# Altium PCB PCB1.PcbDoc
Units mm, origin at the board's own origin, x right, y up, seen from the top; angles counter-clockwise.
Board outline 33.58 x 53.72 mm, 2 copper layers (Top Layer, Bottom Layer), stack 1.569 mm thick; 4 components, 39 nets, 80 pads, 0 vias.
Unrouted connection lines stored in the file: 3.
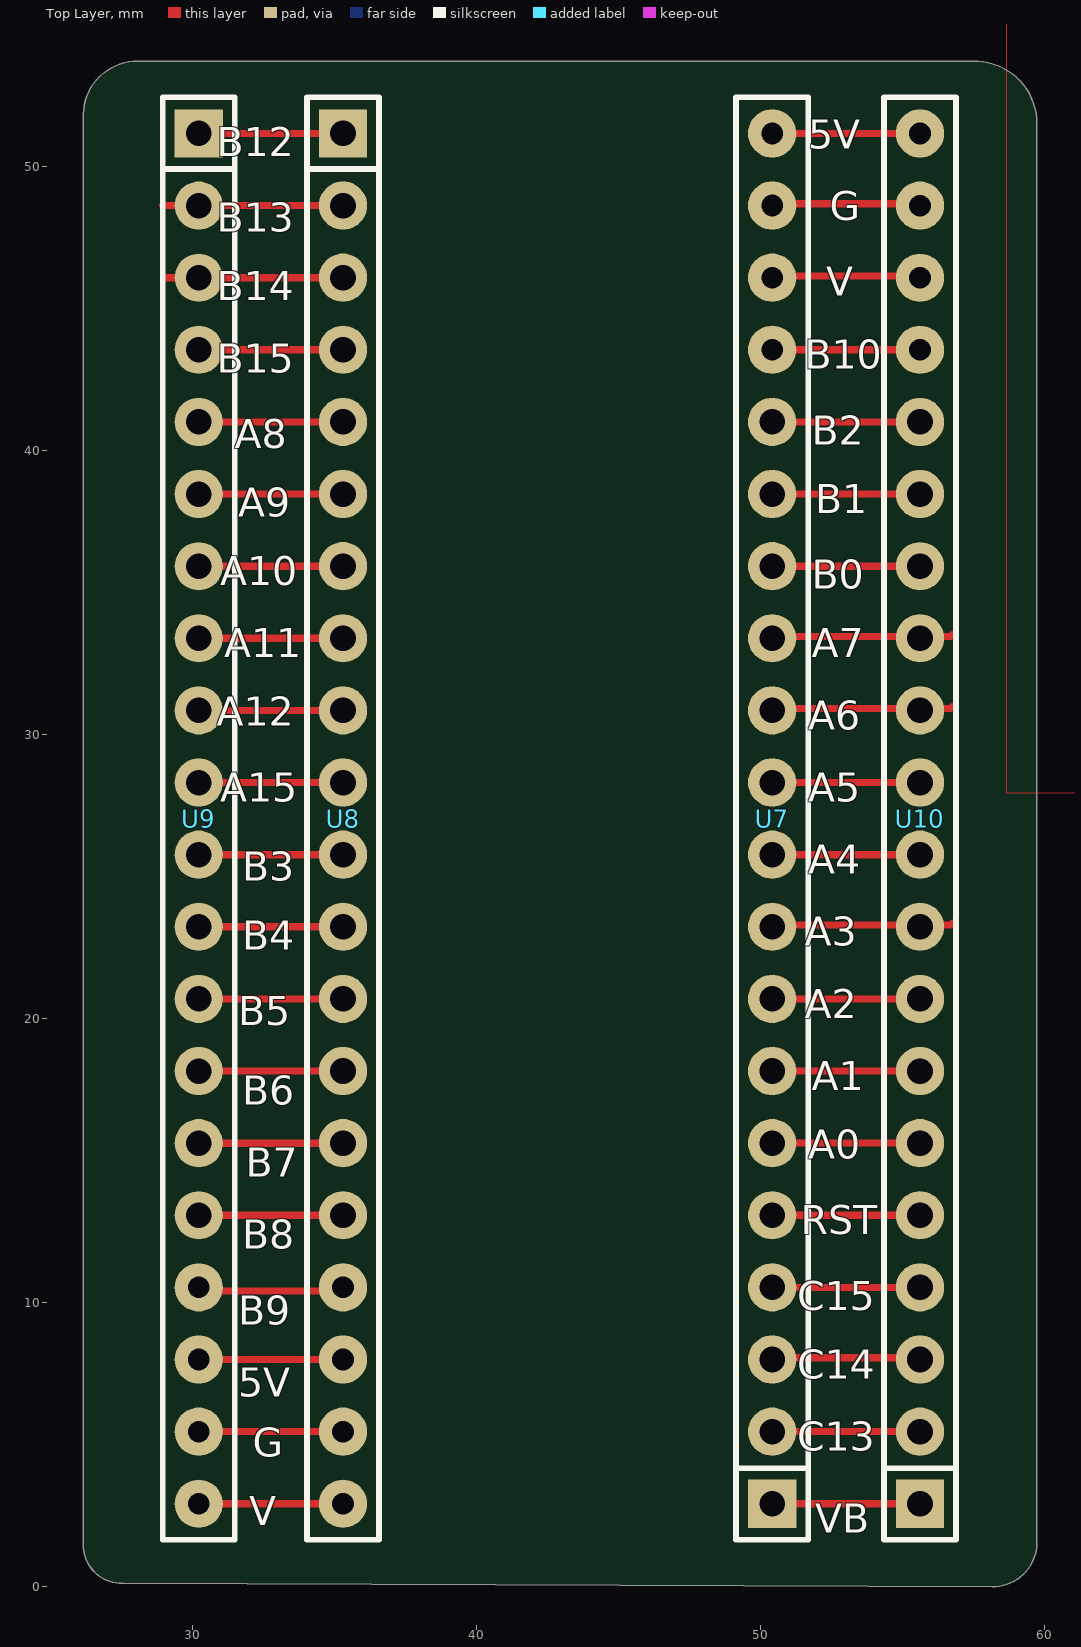
[diagram p0: Top Layer view]
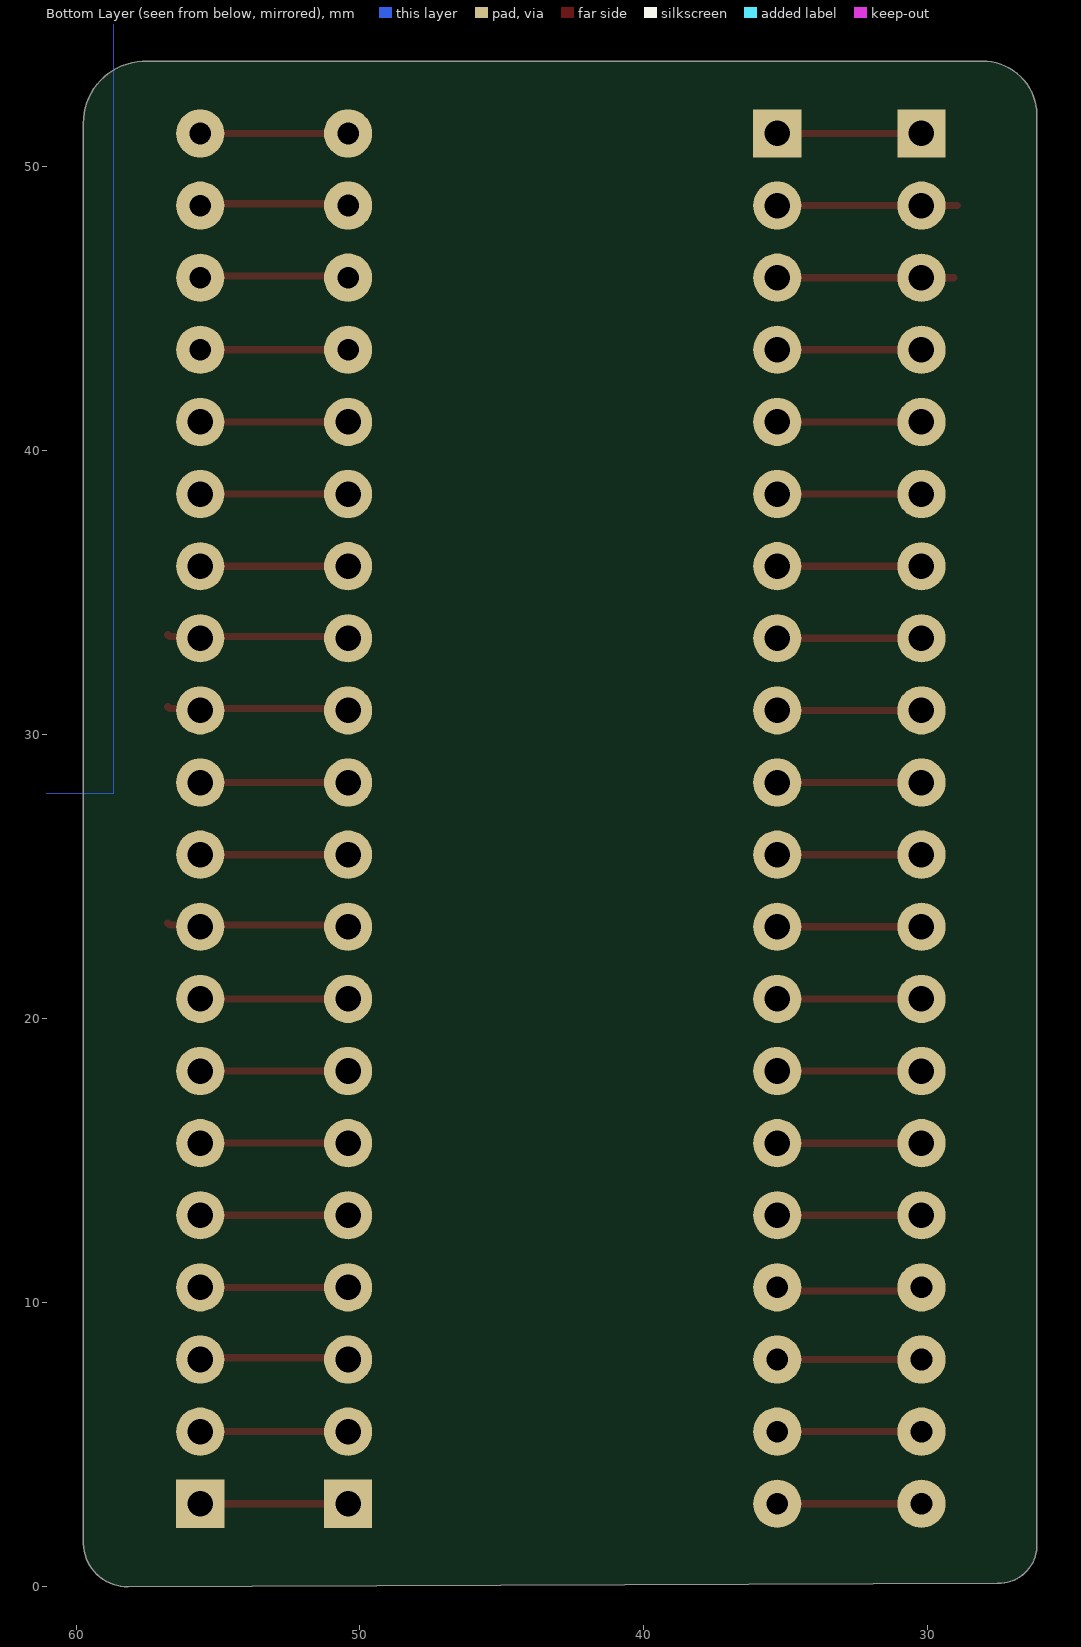
[diagram p1: Bottom Layer view, seen from below]

## Layer stack, top to bottom
Top Solder: solder mask 0.0254, SM-001, Dk 4
Top Layer: signal copper 0.035
Dielectric 1: core 1.4986, Core-043, Dk 4.3
Bottom Layer: signal copper 0.035
Bottom Solder: solder mask 0.0254, SM-001, Dk 4

## Board outline
26.162,1.39 ccw(c27.496,1.461) 27.53,0.126 ccw(c27.559,0.25) 27.558,0.123 58.165,0 ccw(c58.192,1.55) 59.741,1.522 ccw(c59.614,1.525) 59.741,1.525 59.741,51.432 ccw(c57.556,51.537) 59.744,51.537 ccw(c57.556,51.537) 57.664,53.722 ccw(c57.658,53.595) 57.657,53.722 27.94,53.722 ccw(c27.94,53.595) 27.918,53.72 ccw(c28.067,51.816) 26.162,51.684 26.162,1.398 ccw(c26.289,1.398)

## Design rules (kind name [scope] priority, off if disabled: settings)
Clearance [All] p1: gap=0.127 ignorepadtopadclearanceinfootprint=TRUE
PolygonConnect [All] p1: connectstyle=Relief reliefconductorwidth=0.254 reliefentries=4 polygonreliefangle="90 Angle" airgapwidth=0.254
RoutingVias [All] p1: holewidth=0.711 width=1.27 viastyle="Through Hole" minholewidth=0.711 minwidth=1.27 maxholewidth=0.711 maxwidth=1.27
SolderMaskExpansion [All] p1: expansion=0.102 istentingtop=FALSE
Width [All] p1: maxlimit=0.254 minlimit=0.254 preferedwidth=0.254
30 further rules are at their usual default settings.

## Classes and differential pairs
component class Sheet1: U7 U9 U10

## Components (designator, comment, footprint, x,y, rotation, side; value= is the part's Value field where it differs from the comment)
U7 "stm32f4" 20PIN 51.181,23.369 r90 top
U8 "stm32f4" 20PIN 34.544,30.735 r270 top
U9 "stm32f4" 20PIN 29.464,30.734 r270 top
U10 "stm32f4" 20PIN 56.388,23.368 r90 top

## Footprints (in the part's own frame and the unit in brackets; to place one, negate y for a bottom-side part, rotate by r counter-clockwise, add the part's x,y. Pads: shape width x height; smd on the part's side, far side on the other; paste and mask are expansions set on the pad)
20PIN [mm] "P?"
  rect 1.7x1.7 hole 0.9: 1(-20.447,0.762)
  round 1.7 hole 0.9: 2(-17.907,0.762) 3(-15.367,0.762) 4(-12.827,0.762) 5(-10.287,0.762) 6(-7.747,0.762) 7(-5.207,0.762) 8(-2.667,0.762) 9(-0.127,0.762) 10(2.413,0.762) 11(4.953,0.762) 12(7.493,0.762) 13(10.033,0.762) 14(12.573,0.762) 15(15.113,0.762) 16(17.653,0.762)
  round 1.7 hole 0.762: 17(20.193,0.762) 18(22.733,0.762) 19(25.273,0.762) 20(27.813,0.762)
  silkscreen extent -21.72,-0.51 29.08,2.03, body extent -21.72,-0.51 29.08,2.03, height 8.5

## Nets (pads, with @x,y where several pads share a name; then routed paths per layer and width w, separated by ;. In a path a pad name is that pad's centre, name@x,y a point inside that pad or via, vN(x,y) a via of type N, cw(c..) or ccw(c..) an arc to the next point about the centre after c; other vN are vias at no path point)
3V3: U7.18 U8.20 U9.20 U10.18 | length 10.7
  Top Layer w0.254: U9.20@29.845,2.922 U8.20 ; U7.18 50.482,46.165 U10.18@55.626,46.165
5V: U7.20 U8.18 U9.18 U10.20 | length 10.3
  Top Layer w0.254: U9.18 U8.18 ; U7.20 U10.20
GND: U7.19 U8.19 U9.19 U10.19 | length 10.3
  Top Layer w0.254: U9.19 U8.19 ; U7.19 50.482,48.705 U10.19@55.626,48.705
LCD_BLK: U7.15 U10.15 | length 5.2
  Top Layer w0.254: U7.15 53.213,38.482 U10.15
LCD_CS: U7.10 U10.10 | length 5.2
  Top Layer w0.254: U7.10 53.213,25.782 U10.10
LCD_RES: U7.14 U10.14 | length 5.2
  Top Layer w0.254: U7.14 53.213,35.942 U10.14
LCD_RS: U7.13 U10.13 | length 6.4
  Top Layer w0.254: U7.13 50.482,33.465 53.213,33.465 55.626,33.465 56.706,33.465 56.769,33.529
LCD_SCL: U7.11 U10.11 | length 5.2
  Top Layer w0.254: U7.11 53.213,28.322 U10.11
LCD_SDA: U7.12 U10.12 | length 6.4
  Top Layer w0.254: U7.12 50.482,30.925 53.213,30.925 55.626,30.925 56.706,30.925 56.769,30.989
MPU_SCL: U8.11 U9.11 | length 5.1
  Top Layer w0.254: U9.11 U8.11
MPU_SDA: U8.12 U9.12 | length 5.3
  Top Layer w0.254: U9.12@29.972,23.242 U8.12
NetLED1_1: 
NetLED2_1: 
NRST: U7.5 U10.5 | length 5.2
  Top Layer w0.254: U7.5 53.213,13.082 U10.5
OLED_SCL: U8.16 U9.16 | length 5.1
  Top Layer w0.254: U9.16 U8.16
OLED_SDA: U8.17 U9.17 | length 5.2
  Top Layer w0.254: U9.17 30.353,10.414 35.178,10.414 U8.17
PA0: U7.6 U10.6 | length 5.2
  Top Layer w0.254: U7.6 53.213,15.622 U10.6
PA1: U7.7 U10.7 | length 5.2
  Top Layer w0.254: U7.7 53.213,18.162 U10.7
PA2: U7.8 U10.8 | length 5.4
  Top Layer w0.254: U7.8@50.27,20.85 U7.8 53.213,20.702 U10.8
PA3: U7.9 U10.9 | length 6.4
  Top Layer w0.254: U7.9 50.482,23.305 53.213,23.305 55.626,23.305 56.706,23.305 56.769,23.369
PA8: U8.5 U9.5 | length 5.1
  Top Layer w0.254: U9.5 U8.5
PA9: U8.6 U9.6 | length 5.1
  Top Layer w0.254: U9.6 U8.6
PA10: U8.7 U9.7 | length 5.2
  Top Layer w0.254: U9.7@30.099,35.942 U8.7
PA11: U8.8 U9.8 | length 5.1
  Top Layer w0.254: U9.8 U8.8
PA12: U8.9 U9.9 | length 5.1
  Top Layer w0.254: U9.9 U8.9
PA15: U8.10 U9.10 | length 5.1
  Top Layer w0.254: U9.10 U8.10
PB2: U7.16 U10.16 | length 5.2
  Top Layer w0.254: U7.16 53.213,41.022 U10.16
PB5: U8.13 U9.13 | length 5.1
  Top Layer w0.254: U9.13 U8.13
PB6: U8.14 U9.14 | length 5.1
  Top Layer w0.254: U9.14 U8.14
PB7: U8.15 U9.15 | length 5.1
  Top Layer w0.254: U9.15 U8.15
PB10: U7.17 U10.17 | length 5.2
  Top Layer w0.254: U7.17 53.213,43.562 U10.17
PB12: U8.1 U9.1 | length 5.3
  Top Layer w0.254: U9.1@29.972,51.182 U8.1
PB13: U8.2 U9.2 | length 6.6
  Top Layer w0.254: 28.956,48.642 U8.2 U8.2@35.601,48.642
PB14: U8.3 U9.3 | length 6.6
  Top Layer w0.254: 29.083,46.102 U8.3
  Bottom Layer w0.254: U8.3 U8.3@35.56,46.356
PB15: U8.4 U9.4 | length 5.3
  Top Layer w0.254: U9.4@29.972,43.562 U8.4
PC13: U7.2 U10.2 | length 5.2
  Top Layer w0.254: U7.2 53.213,5.462 U10.2
PC14: U7.3 U10.3 | length 5.2
  Top Layer w0.254: U7.3 50.482,8.065 53.213,8.065 U10.3@55.626,8.065
PC15: U7.4 U10.4 | length 5.2
  Top Layer w0.254: U7.4 53.213,10.542 U10.4
VBAT: U7.1 U10.1 | length 5.2
  Top Layer w0.254: U7.1 53.213,2.922 U10.1

## Polygon pours and split planes (outlines as drawn)
GND on Top Layer "NONET_L01_P005" (solid, remove dead copper, shelved, pour order 5): 58.674,100.965 158.623,100.965 158.623,27.94 58.674,27.94
GND on Bottom Layer "NONET_L02_P006" (solid, remove dead copper, shelved, pour order 6): 58.674,100.965 158.623,100.965 158.623,27.94 58.674,27.94

## Silkscreen, mask and mechanical layers (free items; w line width, h text height)
Top Overlay:
  text "5V" at 51.689,50.635 h1.02
  text "B12" at 30.861,50.381 h1.02
  text "G" at 52.451,48.133 h1.02
  text "B13" at 30.861,47.714 h1.02
  text "V" at 52.324,45.466 h1.02
  text "B14" at 30.861,45.301 h1.02
  text "B10" at 51.562,42.888 h1.02
  text "B15" at 30.861,42.761 h1.02
  text "B2" at 51.816,40.221 h1.02
  text "A8" at 31.496,40.094 h1.02
  text "B1" at 51.943,37.808 h1.02
  text "A9" at 31.623,37.681 h1.02
  text "A10" at 30.988,35.268 h1.02
  text "B0" at 51.816,35.141 h1.02
  text "A11" at 31.115,32.728 h1.02
  text "A7" at 51.816,32.728 h1.02
  text "A12" at 30.861,30.315 h1.02
  text "A6" at 51.689,30.188 h1.02
  text "A15" at 30.988,27.648 h1.02
  text "A5" at 51.689,27.648 h1.02
  text "A4" at 51.689,25.108 h1.02
  text "B3" at 31.75,24.854 h1.02
  text "A3" at 51.562,22.568 h1.02
  text "B4" at 31.75,22.441 h1.02
  text "A2" at 51.562,20.028 h1.02
  text "B5" at 31.623,19.774 h1.02
  text "A1" at 51.816,17.488 h1.02
  text "B6" at 31.75,16.98 h1.02
  text "A0" at 51.689,15.075 h1.02
  text "B7" at 31.877,14.44 h1.02
  text "RST" at 51.435,12.408 h1.02
  text "B8" at 31.75,11.9 h1.02
  text "C15" at 51.308,9.741 h1.02
  text "B9" at 31.623,9.233 h1.02
  text "C14" at 51.308,7.328 h1.02
  text "5V" at 31.623,6.693 h1.02
  text "C13" at 51.308,4.788 h1.02
  text "G" at 32.131,4.572 h1.02
  text "V" at 32.004,2.159 h1.02
  text "VB" at 51.943,1.905 h1.02
Mechanical 13:
  lines w0.254: 26.289,1.398 26.289,51.817 ; 26.289,1.398 ccw(c27.496,1.461) 27.559,0.255 ; 26.289,51.689 cw(c28.067,51.816) 27.94,53.594 57.658,53.595 cw(c57.556,51.537) 59.614,51.436 59.614,1.525 cw(c58.192,1.55) 58.166,0.128 27.559,0.25